# Altium PCB BBONE_TEMP.PcbDoc
Units mil, origin at the board's own origin, x right, y up, seen from the top; angles counter-clockwise.
Board outline 6000 x 4000 mil, 2 copper layers (Top Layer, Bottom Layer); 102 components, 645 nets, 842 pads, 89 vias.
Unrouted connection lines stored in the file: 281.
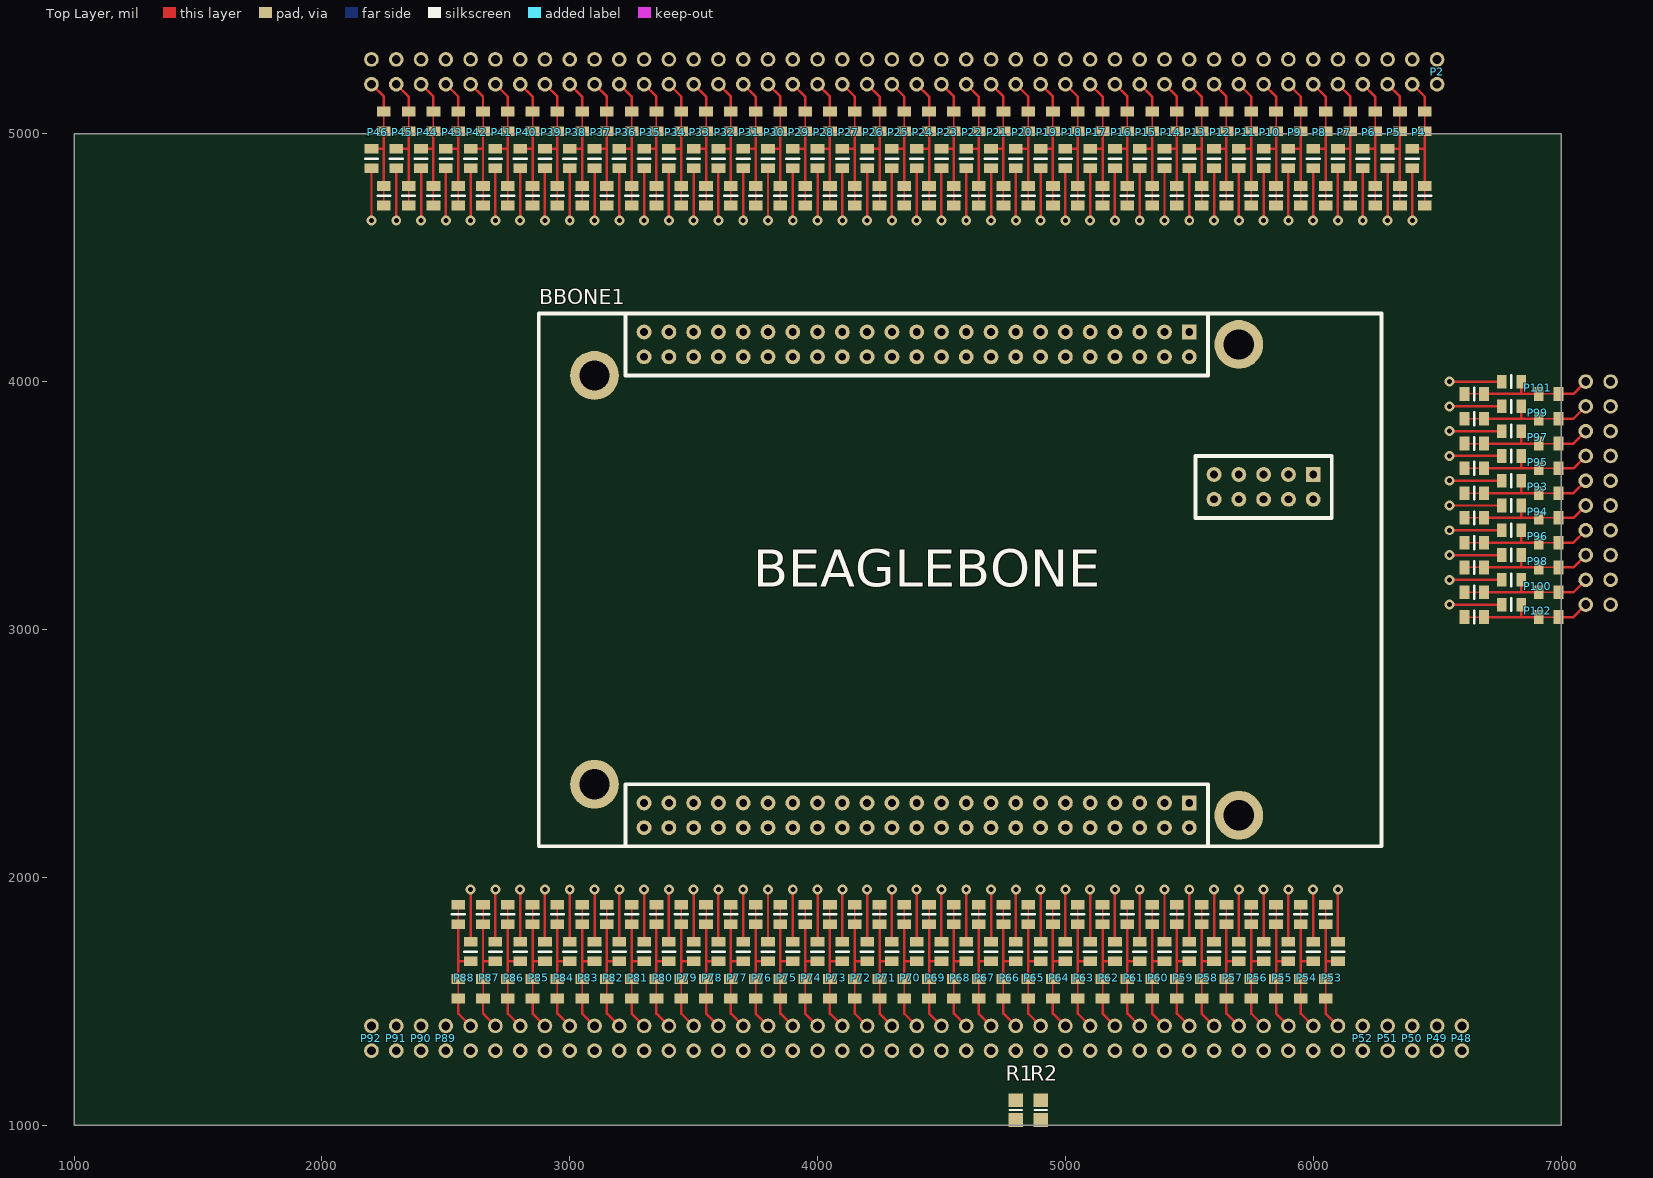
[diagram p0: Top Layer view]
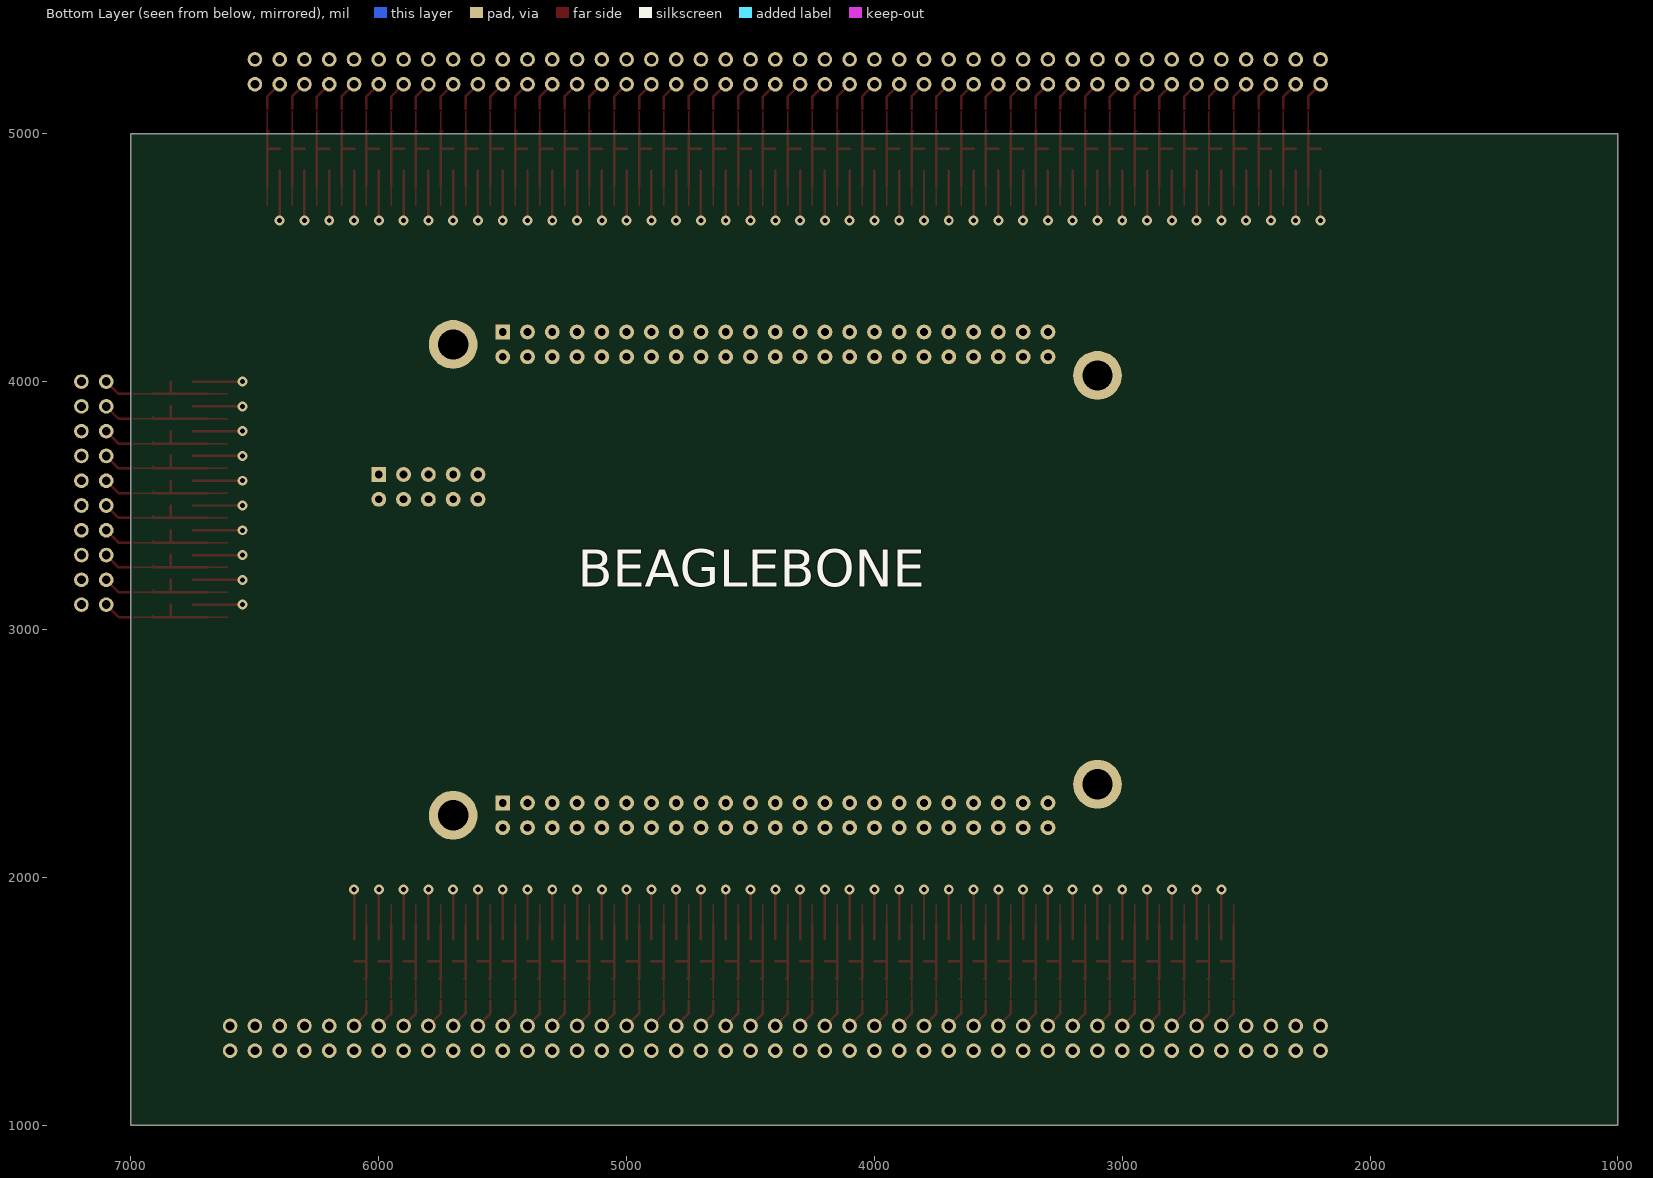
[diagram p1: Bottom Layer view, seen from below]

## Layer stack, top to bottom
Top Layer: signal copper 1.4
Dielectric: dielectric 12.6, FR-4, Dk 4.8
Bottom Layer: signal copper 1.4

## Board outline
1000,1000 7000,1000 7000,5000 1000,5000

## Design rules (kind name [scope] priority, off if disabled: settings)
Clearance [All] p1: gap=10
PolygonConnect [All] p1: connectstyle=Relief reliefconductorwidth=10 reliefentries=4 polygonreliefangle="90 Angle"
RoutingVias [All] p1: holewidth=28 width=50 viastyle="Through Hole" minholewidth=28 minwidth=50 maxholewidth=28 maxwidth=50
SilkscreenOverComponentPads [All] p1: minsilkscreentomaskgap=10
SolderMaskExpansion [All] p1: expansion=4
Width [All] p1: maxlimit=10 minlimit=10 preferedwidth=10
27 further rules are at their usual default settings.

## Components (designator, comment, footprint, x,y, rotation, side; value= is the part's Value field where it differs from the comment)
BBONE1 "Beagle_Bone" Beaglebone 2875,4275 r0 top
P2 "Jumper" Jumper 6500,5300 r270 top
P4 "Jumper_Filter" Jumper_filter 6400,5300 r270 top
P5 "Jumper_Filter" Jumper_filter 6300,5300 r270 top
P6 "Jumper_Filter" Jumper_filter 6200,5300 r270 top
P7 "Jumper_Filter" Jumper_filter 6100,5300 r270 top
P8 "Jumper_Filter" Jumper_filter 6000,5300 r270 top
P9 "Jumper_Filter" Jumper_filter 5900,5300 r270 top
P10 "Jumper_Filter" Jumper_filter 5800,5300 r270 top
P11 "Jumper_Filter" Jumper_filter 5700,5300 r270 top
P12 "Jumper_Filter" Jumper_filter 5600,5300 r270 top
P13 "Jumper_Filter" Jumper_filter 5500,5300 r270 top
P14 "Jumper_Filter" Jumper_filter 5400,5300 r270 top
P15 "Jumper_Filter" Jumper_filter 5300,5300 r270 top
P16 "Jumper_Filter" Jumper_filter 5200,5300 r270 top
P17 "Jumper_Filter" Jumper_filter 5100,5300 r270 top
P18 "Jumper_Filter" Jumper_filter 5000,5300 r270 top
P19 "Jumper_Filter" Jumper_filter 4900,5300 r270 top
P20 "Jumper_Filter" Jumper_filter 4800,5300 r270 top
P21 "Jumper_Filter" Jumper_filter 4700,5300 r270 top
P22 "Jumper_Filter" Jumper_filter 4600,5300 r270 top
P23 "Jumper_Filter" Jumper_filter 4500,5300 r270 top
P24 "Jumper_Filter" Jumper_filter 4400,5300 r270 top
P25 "Jumper_Filter" Jumper_filter 4300,5300 r270 top
P26 "Jumper_Filter" Jumper_filter 4200,5300 r270 top
P27 "Jumper_Filter" Jumper_filter 4100,5300 r270 top
P28 "Jumper_Filter" Jumper_filter 4000,5300 r270 top
P29 "Jumper_Filter" Jumper_filter 3900,5300 r270 top
P30 "Jumper_Filter" Jumper_filter 3800,5300 r270 top
P31 "Jumper_Filter" Jumper_filter 3700,5300 r270 top
P32 "Jumper_Filter" Jumper_filter 3600,5300 r270 top
P33 "Jumper_Filter" Jumper_filter 3500,5300 r270 top
P34 "Jumper_Filter" Jumper_filter 3400,5300 r270 top
P35 "Jumper_Filter" Jumper_filter 3300,5300 r270 top
P36 "Jumper_Filter" Jumper_filter 3200,5300 r270 top
P37 "Jumper_Filter" Jumper_filter 3100,5300 r270 top
P38 "Jumper_Filter" Jumper_filter 3000,5300 r270 top
P39 "Jumper_Filter" Jumper_filter 2900,5300 r270 top
P40 "Jumper_Filter" Jumper_filter 2800,5300 r270 top
P41 "Jumper_Filter" Jumper_filter 2700,5300 r270 top
P42 "Jumper_Filter" Jumper_filter 2600,5300 r270 top
P43 "Jumper_Filter" Jumper_filter 2500,5300 r270 top
P44 "Jumper_Filter" Jumper_filter 2400,5300 r270 top
P45 "Jumper_Filter" Jumper_filter 2300,5300 r270 top
P46 "Jumper_Filter" Jumper_filter 2200,5300 r270 top
P48 "Jumper" Jumper 6600,1300 r90 top
P49 "Jumper" Jumper 6500,1300 r90 top
P50 "Jumper" Jumper 6400,1300 r90 top
P51 "Jumper" Jumper 6300,1300 r90 top
P52 "Jumper" Jumper 6200,1300 r90 top
P53 "Jumper_Filter" Jumper_filter 6100,1300 r90 top
P54 "Jumper_Filter" Jumper_filter 6000,1300 r90 top
P55 "Jumper_Filter" Jumper_filter 5900,1300 r90 top
P56 "Jumper_Filter" Jumper_filter 5800,1300 r90 top
P57 "Jumper_Filter" Jumper_filter 5700,1300 r90 top
P58 "Jumper_Filter" Jumper_filter 5600,1300 r90 top
P59 "Jumper_Filter" Jumper_filter 5500,1300 r90 top
P60 "Jumper_Filter" Jumper_filter 5400,1300 r90 top
P61 "Jumper_Filter" Jumper_filter 5300,1300 r90 top
P62 "Jumper_Filter" Jumper_filter 5200,1300 r90 top
P63 "Jumper_Filter" Jumper_filter 5100,1300 r90 top
P64 "Jumper_Filter" Jumper_filter 5000,1300 r90 top
P65 "Jumper_Filter" Jumper_filter 4900,1300 r90 top
P66 "Jumper_Filter" Jumper_filter 4800,1300 r90 top
P67 "Jumper_Filter" Jumper_filter 4700,1300 r90 top
P68 "Jumper_Filter" Jumper_filter 4600,1300 r90 top
P69 "Jumper_Filter" Jumper_filter 4500,1300 r90 top
P70 "Jumper_Filter" Jumper_filter 4400,1300 r90 top
P71 "Jumper_Filter" Jumper_filter 4300,1300 r90 top
P72 "Jumper_Filter" Jumper_filter 4200,1300 r90 top
P73 "Jumper_Filter" Jumper_filter 4100,1300 r90 top
P74 "Jumper_Filter" Jumper_filter 4000,1300 r90 top
P75 "Jumper_Filter" Jumper_filter 3900,1300 r90 top
P76 "Jumper_Filter" Jumper_filter 3800,1300 r90 top
P77 "Jumper_Filter" Jumper_filter 3700,1300 r90 top
P78 "Jumper_Filter" Jumper_filter 3600,1300 r90 top
P79 "Jumper_Filter" Jumper_filter 3500,1300 r90 top
P80 "Jumper_Filter" Jumper_filter 3400,1300 r90 top
P81 "Jumper_Filter" Jumper_filter 3300,1300 r90 top
P82 "Jumper_Filter" Jumper_filter 3200,1300 r90 top
P83 "Jumper_Filter" Jumper_filter 3100,1300 r90 top
P84 "Jumper_Filter" Jumper_filter 3000,1300 r90 top
P85 "Jumper_Filter" Jumper_filter 2900,1300 r90 top
P86 "Jumper_Filter" Jumper_filter 2800,1300 r90 top
P87 "Jumper_Filter" Jumper_filter 2700,1300 r90 top
P88 "Jumper_Filter" Jumper_filter 2600,1300 r90 top
P89 "Jumper" Jumper 2500,1300 r90 top
P90 "Jumper" Jumper 2400,1300 r90 top
P91 "Jumper" Jumper 2300,1300 r90 top
P92 "Jumper" Jumper 2200,1300 r90 top
P93 "Jumper_Filter" Jumper_filter 7200,3600 r180 top
P94 "Jumper_Filter" Jumper_filter 7200,3500 r180 top
P95 "Jumper_Filter" Jumper_filter 7200,3700 r180 top
P96 "Jumper_Filter" Jumper_filter 7200,3400 r180 top
P97 "Jumper_Filter" Jumper_filter 7200,3800 r180 top
P98 "Jumper_Filter" Jumper_filter 7200,3300 r180 top
P99 "Jumper_Filter" Jumper_filter 7200,3900 r180 top
P100 "Jumper_Filter" Jumper_filter 7200,3200 r180 top
P101 "Jumper_Filter" Jumper_filter 7200,4000 r180 top
P102 "Jumper_Filter" Jumper_filter 7200,3100 r180 top
R1 "1206 Resistor" 6-0805_M 4800,1060 r90 top
R2 "1206 Resistor" 6-0805_M 4900,1060 r90 top

## Footprints (in the part's own frame and the unit in brackets; to place one, negate y for a bottom-side part, rotate by r counter-clockwise, add the part's x,y. Pads: shape width x height; smd on the part's side, far side on the other; paste and mask are expansions set on the pad)
6-0805_M [mm] "Chip Resistor, Body 2.0x1.2mm, IPC Low Density"
  rect 1.4x1.5 smd: 1(-1,0) 2(1,0)
  silkscreen extent 0,-0.65 0,0.65, body extent -1.07,-0.7 1.07,0.7, height 0.7
Beaglebone [mil]
  rect 60x60 hole 31.5 mask+2.76: A01(2625,-75) B01(2625,-1975) P01(3125,-650)
  round 60 hole 31.5 mask+2.76: A02(2625,-175) A03(2525,-75) A04(2525,-175) A05(2425,-75) A06(2425,-175) A07(2325,-75) A08(2325,-175) A09(2225,-75) A10(2225,-175) A11(2125,-75) A12(2125,-175) A13(2025,-75) A14(2025,-175) A15(1925,-75) A16(1925,-175) A17(1825,-75) A18(1825,-175) A19(1725,-75) A20(1725,-175) A21(1625,-75) A22(1625,-175) A23(1525,-75) A24(1525,-175) A25(1425,-75) A26(1425,-175) A27(1325,-75) A28(1325,-175) A29(1225,-75) A30(1225,-175) A31(1125,-75) A32(1125,-175) A33(1025,-75) A34(1025,-175) A35(925,-75) A36(925,-175) A37(825,-75) A38(825,-175) A39(725,-75) A40(725,-175) A41(625,-75) A42(625,-175) A43(525,-75) A44(525,-175) A45(425,-75) A46(425,-175) B02(2625,-2075) B03(2525,-1975) B04(2525,-2075) B05(2425,-1975) B06(2425,-2075) B07(2325,-1975) B08(2325,-2075) B09(2225,-1975) B10(2225,-2075) B11(2125,-1975) B12(2125,-2075) B13(2025,-1975) B14(2025,-2075) B15(1925,-1975) B16(1925,-2075) B17(1825,-1975) B18(1825,-2075) B19(1725,-1975) B20(1725,-2075) B21(1625,-1975) B22(1625,-2075) B23(1525,-1975) B24(1525,-2075) B25(1425,-1975) B26(1425,-2075) B27(1325,-1975) B28(1325,-2075) B29(1225,-1975) B30(1225,-2075) B31(1125,-1975) B32(1125,-2075) B33(1025,-1975) B34(1025,-2075) B35(925,-1975) B36(925,-2075) B37(825,-1975) B38(825,-2075) B39(725,-1975) B40(725,-2075) B41(625,-1975) B42(625,-2075) B43(525,-1975) B44(525,-2075) B45(425,-1975) B46(425,-2075) P02(3125,-750) P03(3025,-650) P04(3025,-750) P05(2925,-650) P06(2925,-750) P07(2825,-650) P08(2825,-750) P09(2725,-650) P10(2725,-750)
  round 196.85 hole 122.05 mask+2.76: M1(225,-250) M2(225,-1900) M3(2825,-125) M4(2825,-2025)
  silkscreen extent 0,-2150 3400,0
Jumper [mm] "Connector; Header; 2 Position"
  round 1.5 hole 0.9: 1(0,0) 2(2.54,0)
Jumper_filter [mm] "Connector; Header; 2 Position"
  round 1.5 hole 0.9: 1(0,0) 2(2.54,0)
  rect 1x1.4 smd: 2(5.35,1.27) 2(7.35,1.27) 2(9.16,0) 2(12.97,1.27) 2(14.97,1.27) 3(11.16,0)
  Top Layer lines w0.152: 7.366,1.016 7.366,1.27 ; 14.986,1.27 5.334,1.27
  Top Layer lines w0.254: 16.51,0 11.43,0 ; 9.144,0 9.144,1.27 ; 2.54,0 3.81,1.27 5.08,1.27 ; 12.954,1.27 7.366,1.27
  silkscreen extent 10.16,-0.65 13.97,1.92, body extent 5.25,-0.65 15.07,1.92, height 0.5

## Part data
R1 R2: library part "1206 Thick Film Resistor 1%", "1206 Thick Film Resistor 1%"

## Via types
v1: diameter 40, hole 20, Top Layer to Bottom Layer, 89 vias

## Nets (pads, with @x,y where several pads share a name; then routed paths per layer and width w, separated by ;. In a path a pad name is that pad's centre, name@x,y a point inside that pad or via, vN(x,y) a via of type N, cw(c..) or ccw(c..) an arc to the next point about the centre after c; other vN are vias at no path point)
3V3_AUX: 
3V3_AUX_E\N\: 
3V3_BBONE: P49.1 P50.1 R1.1 R2.1
3V3_COMMS: 
3V3_CSC: 
3V3_PWR: 
3V3_UNREG: 
5V0_AUX: 
5V0_AUX_E\N\: 
5V0_BBONE: P51.1 P52.1
5V0_BCR: 
5V0_TELEM: 
5V0_UNREG: 
8V0_RX1: 
8V0_RX2: 
AFSK1_DET: 
AFSK1_M0: 
AFSK1_M1: 
AFSK1_RX: 
AFSK1_RXD: 
AFSK1_TX: 
AFSK1_TXD: 
AFSK2_DET: 
AFSK2_M0: 
AFSK2_M1: 
AFSK2_RX: 
AFSK2_RXD: 
AFSK2_TX: 
AFSK2_TXD: 
BBONE_E\N\: 
BBONE_I2C2_SCL: P65.1 R2.2
BBONE_I2C2_SDA: P66.1 R1.2
BCR_E\N\: 
BCR_MISO: 
BCR_MOSI: 
BCR_R\S\T\: 
BCR_SCK: 
COMMS_E\N\: 
CSC_E\N\: 
CSC_ISP: 
CSC_RST: 
DTMF1Q1: 
DTMF1Q2: 
DTMF1Q3: 
DTMF1Q4: 
DTMF1ST: 
DTMF2Q1: 
DTMF2Q2: 
DTMF2Q3: 
DTMF2Q4: 
DTMF2ST: 
GND: P2.1 P4.3 P5.3 P6.3 P7.3 P8.3 P9.3 P10.3 P11.3 P12.3 P13.3 P14.3 P15.3 P16.3 P17.3 P18.3 P19.3 P20.3 P21.3 P22.3 P23.3 P24.3 P25.3 P26.3 P27.3 P28.3 P29.3 P30.3 P31.3 P32.3 P33.3 P34.3 P35.3 P36.3 P37.3 P38.3 P39.3 P40.3 P41.3 P42.3 P43.3 P44.3 P45.3 P46.3 P48.1 P53.3 P54.3 P55.3 P56.3 P57.3 P58.3 P59.3 P60.3 P61.3 P62.3 P63.3 P64.3 P65.3 P66.3 P67.3 P68.3 P69.3 P70.3 P71.3 P72.3 P73.3 P74.3 P75.3 P76.3 P77.3 P78.3 P79.3 P80.3 P81.3 P82.3 P83.3 P84.3 P85.3 P86.3 P87.3 P88.3 P89.1 P90.1 P91.1 P92.1 P93.3 P94.3 P95.3 P96.3 P97.3 P98.3 P99.3 P100.3 P101.3 P102.3
  other v1: 2600,1950 2700,1950 2800,1950 2900,1950 3000,1950 3100,1950 3200,1950 3300,1950 3400,1950 3500,1950 3600,1950 3700,1950 3800,1950 3900,1950 4000,1950 4100,1950 4200,1950 4300,1950 4400,1950 4500,1950 4600,1950 4700,1950 4800,1950 4900,1950 5000,1950 5100,1950 5200,1950 5300,1950 5400,1950 5500,1950 5600,1950 5700,1950 5800,1950 5900,1950 6000,1950 6100,1950 6550,3100 6550,3200 6550,3300 6550,3400 6550,3500 6550,3600 6550,3700 6550,3800 6550,3900 6550,4000 2200,4650 2300,4650 2400,4650 2500,4650 2600,4650 2700,4650 2800,4650 2900,4650 3000,4650 3100,4650 3200,4650 3300,4650 3400,4650 3500,4650 3600,4650 3700,4650 3800,4650 3900,4650 4000,4650 4100,4650 4200,4650 4300,4650 4400,4650 4500,4650 4600,4650 4700,4650 4800,4650 4900,4650 5000,4650 5100,4650 5200,4650 5300,4650 5400,4650 5500,4650 5600,4650 5700,4650 5800,4650 5900,4650 6000,4650 6100,4650 6200,4650 6300,4650 6400,4650
I2C0_SCL: 
I2C0_SDA: 
I2C1_SCL: P63.1
I2C1_SDA: P64.1
I2C2_SCL: 
I2C2_SCL_5V: 
I2C2_SDA: 
I2C2_SDA_5V: 
NetBBONE1_A01: BBONE1.A01
NetBBONE1_A02: BBONE1.A02 P2.2
NetBBONE1_A03: BBONE1.A03
NetBBONE1_A04: BBONE1.A04 P4.2
NetBBONE1_A05: BBONE1.A05 P5.2
NetBBONE1_A06: BBONE1.A06 P6.2
NetBBONE1_A07: BBONE1.A07 P7.2@6100,5200
NetBBONE1_A08: BBONE1.A08 P8.2@6000,5200
NetBBONE1_A09: BBONE1.A09 P9.2@5900,5200
NetBBONE1_A10: BBONE1.A10 P10.2@5800,5200
NetBBONE1_A11: BBONE1.A11 P11.2@5700,5200
NetBBONE1_A12: BBONE1.A12 P12.2@5600,5200
NetBBONE1_A13: BBONE1.A13 P13.2@5500,5200
NetBBONE1_A14: BBONE1.A14 P14.2@5400,5200
NetBBONE1_A15: BBONE1.A15 P15.2@5300,5200
NetBBONE1_A16: BBONE1.A16 P16.2@5200,5200
NetBBONE1_A17: BBONE1.A17 P17.2@5100,5200
NetBBONE1_A18: BBONE1.A18 P18.2@5000,5200
NetBBONE1_A19: BBONE1.A19 P19.2@4900,5200
NetBBONE1_A20: BBONE1.A20 P20.2
NetBBONE1_A21: BBONE1.A21 P21.2
NetBBONE1_A22: BBONE1.A22 P22.2@4600,5200
NetBBONE1_A23: BBONE1.A23 P23.2@4500,5200
NetBBONE1_A24: BBONE1.A24 P24.2@4400,5200
NetBBONE1_A25: BBONE1.A25 P25.2@4300,5200
NetBBONE1_A26: BBONE1.A26 P26.2@4200,5200
NetBBONE1_A27: BBONE1.A27 P27.2@4100,5200
NetBBONE1_A28: BBONE1.A28 P28.2@4000,5200
NetBBONE1_A29: BBONE1.A29 P29.2@3900,5200
NetBBONE1_A30: BBONE1.A30 P30.2@3800,5200
NetBBONE1_A31: BBONE1.A31 P31.2@3700,5200
NetBBONE1_A32: BBONE1.A32 P32.2@3600,5200
NetBBONE1_A33: BBONE1.A33 P33.2@3500,5200
NetBBONE1_A34: BBONE1.A34 P34.2@3400,5200
NetBBONE1_A35: BBONE1.A35 P35.2@3300,5200
NetBBONE1_A36: BBONE1.A36 P36.2@3200,5200
NetBBONE1_A37: BBONE1.A37 P37.2@3100,5200
NetBBONE1_A38: BBONE1.A38 P38.2
NetBBONE1_A39: BBONE1.A39 P39.2@2900,5200
NetBBONE1_A40: BBONE1.A40 P40.2@2800,5200
NetBBONE1_A41: BBONE1.A41 P41.2@2700,5200
NetBBONE1_A42: BBONE1.A42 P42.2@2600,5200
NetBBONE1_A43: BBONE1.A43 P43.2@2500,5200
NetBBONE1_A44: BBONE1.A44 P44.2@2400,5200
NetBBONE1_A45: BBONE1.A45 P45.2@2300,5200
NetBBONE1_A46: BBONE1.A46 P46.2@2200,5200
NetBBONE1_B01: BBONE1.B01
NetBBONE1_B02: BBONE1.B02 P48.2
NetBBONE1_B03: BBONE1.B03 P49.2
NetBBONE1_B04: BBONE1.B04 P50.2
NetBBONE1_B05: BBONE1.B05 P51.2
NetBBONE1_B06: BBONE1.B06 P52.2
NetBBONE1_B07: BBONE1.B07 P53.2@6100,1400
NetBBONE1_B08: BBONE1.B08 P54.2@6000,1400
NetBBONE1_B09: BBONE1.B09 P55.2@5900,1400
NetBBONE1_B10: BBONE1.B10 P56.2@5800,1400
NetBBONE1_B11: BBONE1.B11 P57.2
NetBBONE1_B12: BBONE1.B12 P58.2@5600,1400
NetBBONE1_B13: BBONE1.B13 P59.2@5500,1400
NetBBONE1_B14: BBONE1.B14 P60.2@5400,1400
NetBBONE1_B15: BBONE1.B15 P61.2@5300,1400
NetBBONE1_B16: BBONE1.B16 P62.2@5200,1400
NetBBONE1_B17: BBONE1.B17 P63.2@5100,1400
NetBBONE1_B18: BBONE1.B18 P64.2@5000,1400
NetBBONE1_B19: BBONE1.B19 P65.2@4900,1400
NetBBONE1_B20: BBONE1.B20 P66.2@4800,1400
NetBBONE1_B21: BBONE1.B21 P67.2@4700,1400
NetBBONE1_B22: BBONE1.B22 P68.2@4600,1400
NetBBONE1_B23: BBONE1.B23 P69.2@4500,1400
NetBBONE1_B24: BBONE1.B24 P70.2@4400,1400
NetBBONE1_B25: BBONE1.B25 P71.2@4300,1400
NetBBONE1_B26: BBONE1.B26 P72.2@4200,1400
NetBBONE1_B27: BBONE1.B27 P73.2@4100,1400
NetBBONE1_B28: BBONE1.B28 P74.2@4000,1400
NetBBONE1_B29: BBONE1.B29 P75.2@3900,1400
NetBBONE1_B30: BBONE1.B30 P76.2@3800,1400
NetBBONE1_B31: BBONE1.B31 P77.2@3700,1400
NetBBONE1_B32: BBONE1.B32 P78.2@3600,1400
NetBBONE1_B33: BBONE1.B33 P79.2@3500,1400
NetBBONE1_B34: BBONE1.B34 P80.2@3400,1400
NetBBONE1_B35: BBONE1.B35 P81.2@3300,1400
NetBBONE1_B36: BBONE1.B36 P82.2@3200,1400
NetBBONE1_B37: BBONE1.B37 P83.2@3100,1400
NetBBONE1_B38: BBONE1.B38 P84.2@3000,1400
NetBBONE1_B39: BBONE1.B39 P85.2@2900,1400
NetBBONE1_B40: BBONE1.B40 P86.2@2800,1400
NetBBONE1_B41: BBONE1.B41 P87.2@2700,1400
NetBBONE1_B42: BBONE1.B42 P88.2@2600,1400
NetBBONE1_B43: BBONE1.B43 P89.2
NetBBONE1_B44: BBONE1.B44 P90.2
NetBBONE1_B45: BBONE1.B45 P91.2
NetBBONE1_B46: BBONE1.B46 P92.2
NetBBONE1_P01: BBONE1.P01 P93.2@7100,3600
NetBBONE1_P02: BBONE1.P02 P94.2@7100,3500
NetBBONE1_P03: BBONE1.P03 P95.2@7100,3700
NetBBONE1_P04: BBONE1.P04 P96.2@7100,3400
NetBBONE1_P05: BBONE1.P05 P97.2@7100,3800
NetBBONE1_P06: BBONE1.P06 P98.2@7100,3300
NetBBONE1_P07: BBONE1.P07 P99.2@7100,3900
NetBBONE1_P08: BBONE1.P08 P100.2@7100,3200
NetBBONE1_P09: BBONE1.P09 P101.2@7100,4000
NetBBONE1_P10: BBONE1.P10 P102.2@7100,3100
NetBCR1_1: 
NetBCR1_2: 
NetBCR1_3: 
NetBCR1_4: 
NetBCR1_5: 
NetBCR1_6: 
NetBCR1_7: 
NetBCR1_8: 
NetBCR1_9: 
NetBCR1_10: 
NetBCR1_11: 
NetBCR1_12: 
NetBCR1_13: 
NetBCR1_14: 
NetBCR1_15: 
NetBCR1_16: 
NetBCR1_17: 
NetBCR1_18: 
NetBCR1_19: 
NetBCR1_20: 
NetBCR1_21: 
NetBCR1_22: 
NetBCR1_23: 
NetBCR1_24: 
NetBCR1_25: 
NetBCR1_26: 
NetBCR1_27: 
NetBCR1_28: 
NetBCR1_29: 
NetBCR1_30: 
NetBCR1_31: 
NetBCR1_32: 
NetBCR1_33: 
NetBCR1_34: 
NetBCR1_35: 
NetC1_2: 
NetCOMMS_AFSK1_M0: 
NetCOMMS_AFSK1_M1: 
NetCOMMS_AFSK1_RXD: 
NetCOMMS_AFSK1_TXD: 
NetCOMMS_AFSK2_M0: 
NetCOMMS_AFSK2_M1: 
NetCOMMS_AFSK2_RXD: 
NetCOMMS_AFSK2_TXD: 
NetCOMMS_DTMF1_ES: 
NetCOMMS_DTMF1_Q1: 
NetCOMMS_DTMF1_Q2: 
NetCOMMS_DTMF1_Q3: 
NetCOMMS_DTMF1_Q4: 
NetCOMMS_DTMF1_ST: 
NetCOMMS_DTMF2_ES: 
NetCOMMS_DTMF2_Q1: 
NetCOMMS_DTMF2_Q2: 
NetCOMMS_DTMF2_Q3: 
NetCOMMS_DTMF2_Q4: 
NetCOMMS_DTMF2_ST: 
NetCOMMS_GMSK_RX1: 
NetCOMMS_GMSK_RX2: 
NetCOMMS_GMSK_TX1: 
NetCOMMS_GMSK_TX2: 
NetCOMMS_GND: 
NetCOMMS_RX1: 
NetCOMMS_RX2: 
NetCOMMS_S0: 
NetCOMMS_S1: 
NetCOMMS_S2: 
NetCOMMS_S3: 
NetCOMMS_S4: 
NetCOMMS_S5: 
NetCOMMS_S6: 
NetCOMMS_S7: 
NetCOMMS_TX1: 
NetCOMMS_TX2: 
NetCOMMS_VCC: 
NetCSC1_C1_1: 
NetCSC1_C1_2: 
NetCSC1_C1_3: 
NetCSC1_C1_4: 
NetCSC1_C1_5: 
NetCSC1_C1_6: 
NetCSC1_C1_7: 
NetCSC1_C1_8: 
NetCSC1_C1_9: 
NetCSC1_C1_10: 
NetCSC1_C1_11: 
NetCSC1_C1_12: 
NetCSC1_C1_13: 
NetCSC1_C1_14: 
NetCSC1_C1_15: 
NetCSC1_C1_16: 
NetCSC1_C1_17: 
NetCSC1_C1_18: 
NetCSC1_C1_19: 
NetCSC1_C1_20: 
NetCSC1_C1_21: 
NetCSC1_C1_22: 
NetCSC1_C1_23: 
NetCSC1_C1_24: 
NetCSC1_C1_25: 
NetCSC1_C1_26: 
NetCSC1_C1_27: 
NetCSC1_C1_28: 
NetCSC1_C1_29: 
NetCSC1_C1_30: 
NetCSC1_C1_31: 
NetCSC1_C1_32: 
NetCSC1_C1_33: 
NetCSC1_C1_34: 
NetCSC1_C1_35: 
NetCSC1_C1_36: 
NetCSC1_C1_37: 
NetCSC1_C1_38: 
NetCSC1_C1_39: 
NetCSC1_C1_40: 
NetCSC1_C2_1: 
NetCSC1_C2_2: 
NetCSC1_C2_3: 
NetCSC1_C2_4: 
NetCSC1_C2_5: 
NetCSC1_C2_6: 
NetCSC1_C2_7: 
NetCSC1_C2_8: 
NetCSC1_C2_9: 
NetCSC1_C2_10: 
NetCSC1_C2_11: 
NetCSC1_C2_12: 
NetCSC1_C2_13: 
NetCSC1_C2_14: 
NetCSC1_C2_15: 
NetCSC1_C2_16: 
NetCSC1_C2_17: 
NetCSC1_C2_18: 
NetCSC1_C2_19: 
NetCSC1_C2_20: 
NetCSC1_C2_21: 
NetCSC1_C2_22: 
NetCSC1_C2_23: 
NetCSC1_C2_24: 
NetCSC1_C2_25: 
NetCSC1_C2_26: 
NetCSC1_C2_27: 
NetCSC1_C2_28: 
NetCSC1_C2_29: 
NetCSC1_C2_30: 
NetCSC1_C2_31: 
NetCSC1_C2_32: 
NetCSC1_C2_33: 
NetCSC1_C2_34: 
NetCSC1_C2_35: 
NetCSC1_C2_36: 
NetCSC1_C2_37: 
NetCSC1_C2_38: 
NetCSC1_C2_39: 
NetCSC1_C2_40: 
NetCSC1_C3_1: 
NetCSC1_C3_2: 
NetCSC1_C3_3: 
NetCSC1_C3_4: 
NetCSC1_C3_5: 
NetCSC1_C3_6: 
NetCSC1_C3_7: 
NetCSC1_C3_8: 
NetCSC1_C3_9: 
NetCSC1_C3_10: 
NetCSC1_C3_11: 
NetCSC1_C3_12: 
NetCSC1_C3_13: 
NetCSC1_C3_14: 
NetCSC1_C3_15: 
NetCSC1_C3_16: 
NetCSC1_C3_17: 
NetCSC1_C3_18: 
NetCSC1_C3_19: 
NetCSC1_C3_20: 
NetCSC1_C3_21: 
NetCSC1_C3_22: 
NetCSC1_C3_23: 
NetCSC1_C3_24: 
NetCSC1_C3_25: 
NetCSC1_C3_26: 
NetCSC1_C3_27: 
NetCSC1_C3_28: 
NetCSC1_C3_29: 
NetCSC1_C3_30: 
NetCSC1_C3_31: 
NetCSC1_C3_32: 
NetCSC1_C3_33: 
NetCSC1_C3_34: 
NetCSC1_C3_35: 
NetCSC1_C3_36: 
NetCSC1_C3_37: 
NetCSC1_C3_38: 
NetCSC1_C3_39: 
NetCSC1_C3_40: 
NetCSC1_GND: 
NetCSC1_ISP1: 
NetCSC1_ISP2: 
NetCSC1_ISP3: 
NetCSC1_ISP4: 
NetCSC1_ISP5: 
NetCSC1_ISP6: 
NetD1_1: 
NetF13_1: 
NetF14_1: 
NetF15_1: 
NetF16_1: 
NetF17_1: 
NetF18_1: 
NetF19_1: 
NetF20_1: 
NetF21_1: 
NetF22_1: 
NetF23_1: 
NetF24_1: 
NetF25_1: 
NetF26_1: 
NetF27_1: 
NetF28_1: 
NetF29_1: 
NetF30_1: 
NetF31_1: 
NetF32_1: 
NetF32_2: 
NetF33_1: 
NetF33_2: 
NetF34_1: 
NetF34_2: 
NetF35_1: 
NetF35_2: 
NetF36_1: 
NetF36_2: 
NetF37_1: 
NetF37_2: 
NetF38_1: 
NetF38_2: 
NetF39_1: 
NetF39_2: 
NetF40_1: 
NetF40_2: 
NetF41_1: 
NetF41_2: 
NetF42_1: 
NetF42_2: 
NetF43_1: 
NetF43_2: 
NetF44_1: 
NetF44_2: 
NetF45_1: 
NetF45_2: 
NetF46_1: 
NetF46_2: 
NetF47_1: 
NetF47_2: 
NetF48_1: 
NetF48_2: 
NetF50_2: 
NetF51_2: 
NetF52_2: 
NetF53_2: 
NetF54_2: 
NetF55_2: 
NetF56_2: 
NetF57_2: 
NetF58_2: 
NetF59_1: 
NetF60_1: 
NetF61_2: 
NetF62_2: 
NetF63_1: 
NetF64_1: 
NetF65_1: 
NetF66_1: 
NetF67_1: 
NetF68_1: 
NetF69_1: 
NetF70_1: 
NetF71_1: 
NetF72_1: 
NetF73_1: 
NetF74_1: 
NetF75_1: 
NetF76_1: 
NetF77_1: 
NetF78_1: 
NetF79_1: 
NetF80_1: 
NetF81_1: 
NetF82_1: 
NetF83_1: 
NetF84_1: 
NetF84_2: 
NetF85_1: 
NetF86_1: 
NetF87_1: 
NetF88_1: 
NetF89_1: 
NetF91_1: 
NetF92_1: 
NetF93_1: 
NetF94_1: 
NetF95_1: 
NetF96_1: 
NetF97_1: 
NetF98_1: 
NetF99_2: 
NetF100_1: 
NetF101_1: 
NetF102_1: 
NetF103_1: 
NetF104_1: 
NetF105_1: 
NetF106_1: 
NetF106_2: 
NetF107_1: 
NetF107_2: 
NetF108_1: 
NetF108_2: 
NetF109_1: 
NetF109_2: 
NetF110_1: 
NetF110_2: 
NetF111_1: 
NetF111_2: 
NetF112_1: 
NetF112_2: 
NetF113_1: 
NetF113_2: 
NetF114_1: 
NetF114_2: 
NetF115_1: 
NetF115_2: 
NetF116_1: 
NetF116_2: 
NetF117_1: 
NetF117_2: 
NetF118_1: 
NetF118_2: 
NetF119_1: 
NetF119_2: 
NetF120_1: 
NetF120_2: 
NetF121_1: 
NetF121_2: 
NetF122_1: 
NetF122_2: 
NetF123_1: 
NetF123_2: 
NetF124_1: 
NetF124_2: 
NetF125_1: 
NetF125_2: 
NetF126_1: 
NetF126_2: 
NetF127_1: 
NetF127_2: 
NetGMSK1_1C: 
NetGMSK1_2A: 
NetGMSK1_2B: 
NetGMSK1_3A: 
NetGMSK1_3B: 
NetGMSK1_4A: 
NetGMSK1_4B: 
NetGMSK1_5C: 
NetGMSK1_6A: 
NetGMSK1_6B: 
NetGMSK1_8C: 
NetJ15_1: 
NetJ15_2: 
NetJ15_3: 
NetJ15_4: 
NetJ15_5: 
NetJ15_6: 
NetJ15_7: 
NetJ15_8: 
NetJ15_9: 
NetJ16_1: 
NetJ16_2: 
NetJ16_3: 
NetJ16_4: 
NetJ16_5: 
NetJ16_6: 
NetJ16_7: 
NetJ16_8: 
NetJ16_9: 
NetJ25_2: 
NetJ26_2: 
NetLDO1_EN1: 
NetLDO1_EN2: 
NetLDO1_EN3: 
NetLDO1_EN4: 
NetLDO1_GND: 
NetLDO1_RST1: 
NetLDO1_RST2: 
NetLDO1_RST3: 
NetLDO1_RST4: 
NetLDO2_EN1: 
NetLDO2_EN2: 
NetLDO2_EN3: 
NetLDO2_EN4: 
NetLDO2_GND: 
NetLDO2_RST1: 
NetLDO2_RST2: 
NetLDO2_RST3: 
NetLDO2_RST4: 
NetP275_2: 
NetP276_2: 
NetP297_1: 
NetP298_1: 
NetP299_1: 
NetP300_1: 
NetP358_2: 
NetP359_2: 
NetP362_2: 
NetP363_2: 
NetP365_2: 
NetP366_2: 
NetP368_2: 
NetP369_2: 
NetP372_1: 
NetP375_1: 
NetP377_1: 
NetP378_1: 
NetP380_1: 
NetP381_1: 
PLLACQ1: P24.1
PLLACQ2: P25.1
PWR_E\N\: 
RX1_AF: 
RX1_GMSK: 
RX2_AF: 
RX2_GMSK: 
RX_PSAVE1: P15.1
RX_PSAVE2: P16.1
RX_S/N1: P20.1
RX_S/N2: P21.1
RXACQ1: P17.1
RXACQ2: P18.1
RXCLK1: P5.1
RXCLK2: P6.1
RXDATA1: P57.1
RXDATA2: P38.1
RXHOLD1: P11.1
RXHOLD2: P12.1
S0: 
S1: 
S2: 
S3: 
S4: 
S5: 
S6: 
S7: 
SOLA_X+_T: 
SOLA_X+_V: 
SOLA_X-_T: 
SOLA_X-_V: 
SOLA_Y+_T: 
SOLA_Y+_V: 
SOLA_Y-_T: 
SOLA_Y-_V: 
SOLA_Z+_T: 
SOLA_Z+_V: 
SOLA_Z-_T: 
SOLA_Z-_V: 
TBATT: 
TELEM_E\N\: 
TX1_AF: 
TX1_GMSK: 
TX2_AF: 
TX2_GMSK: 
TX_PSAVE1: P22.1
TX_PSAVE2: P23.1
TXCLK1: 
TXCLK2: P4.1
TXDATA1: P59.1
TXDATA2: P37.1
TXEN1: P26.1
TXEN2: P27.1
UART0_RX: 
UART0_TX: 
V_BATT: 
V_LOAD: 
VVAR_TX1: 
VVAR_TX2: 
pads on no net: BBONE1.M1 BBONE1.M2 BBONE1.M3 BBONE1.M4 P7.1 P7.2@6100,4939.37 P7.2@6150,4710.63 P7.2@6150,4789.37 P7.2@6150,5010.63 P7.2@6150,5089.37 P8.1 P8.2@6000,4939.37 P8.2@6050,4710.63 P8.2@6050,4789.37 P8.2@6050,5010.63 P8.2@6050,5089.37 P9.1 P9.2@5900,4939.37 P9.2@5950,4710.63 P9.2@5950,4789.37 P9.2@5950,5010.63 P9.2@5950,5089.37 P10.1 P10.2@5800,4939.37 P10.2@5850,4710.63 P10.2@5850,4789.37 P10.2@5850,5010.63 P10.2@5850,5089.37 P11.2@5700,4939.37 P11.2@5750,4710.63 P11.2@5750,4789.37 P11.2@5750,5010.63 P11.2@5750,5089.37 P12.2@5600,4939.37 P12.2@5650,4710.63 P12.2@5650,4789.37 P12.2@5650,5010.63 P12.2@5650,5089.37 P13.1 P13.2@5500,4939.37 P13.2@5550,4710.63 P13.2@5550,4789.37 P13.2@5550,5010.63 P13.2@5550,5089.37 P14.1 P14.2@5400,4939.37 P14.2@5450,4710.63 P14.2@5450,4789.37 P14.2@5450,5010.63 P14.2@5450,5089.37 P15.2@5300,4939.37 P15.2@5350,4710.63 P15.2@5350,4789.37 P15.2@5350,5010.63 P15.2@5350,5089.37 P16.2@5200,4939.37 P16.2@5250,4710.63 P16.2@5250,4789.37 P16.2@5250,5010.63 P16.2@5250,5089.37 P17.2@5100,4939.37 P17.2@5150,4710.63 P17.2@5150,4789.37 P17.2@5150,5010.63 P17.2@5150,5089.37 P18.2@5000,4939.37 P18.2@5050,4710.63 P18.2@5050,4789.37 P18.2@5050,5010.63 P18.2@5050,5089.37 P19.1 P19.2@4900,4939.37 P19.2@4950,4710.63 P19.2@4950,4789.37 P19.2@4950,5010.63 P19.2@4950,5089.37 P22.2@4600,4939.37 P22.2@4650,4710.63 P22.2@4650,4789.37 P22.2@4650,5010.63 P22.2@4650,5089.37 P23.2@4500,4939.37 P23.2@4550,4710.63 P23.2@4550,4789.37 P23.2@4550,5010.63 P23.2@4550,5089.37 P24.2@4400,4939.37 P24.2@4450,4710.63 P24.2@4450,4789.37 P24.2@4450,5010.63 P24.2@4450,5089.37 P25.2@4300,4939.37 P25.2@4350,4710.63 P25.2@4350,4789.37 P25.2@4350,5010.63 P25.2@4350,5089.37 P26.2@4200,4939.37 P26.2@4250,4710.63 P26.2@4250,4789.37 P26.2@4250,5010.63 P26.2@4250,5089.37 P27.2@4100,4939.37 P27.2@4150,4710.63 P27.2@4150,4789.37 P27.2@4150,5010.63 P27.2@4150,5089.37 P28.1 P28.2@4000,4939.37 P28.2@4050,4710.63 P28.2@4050,4789.37 P28.2@4050,5010.63 P28.2@4050,5089.37 P29.1 P29.2@3900,4939.37 P29.2@3950,4710.63 P29.2@3950,4789.37 P29.2@3950,5010.63 P29.2@3950,5089.37 P30.1 P30.2@3800,4939.37 P30.2@3850,4710.63 P30.2@3850,4789.37 P30.2@3850,5010.63 P30.2@3850,5089.37 P31.1 P31.2@3700,4939.37 P31.2@3750,4710.63 P31.2@3750,4789.37 P31.2@3750,5010.63 P31.2@3750,5089.37 P32.1 P32.2@3600,4939.37 P32.2@3650,4710.63 P32.2@3650,4789.37 P32.2@3650,5010.63 P32.2@3650,5089.37 P33.1 P33.2@3500,4939.37 P33.2@3550,4710.63 P33.2@3550,4789.37 P33.2@3550,5010.63 P33.2@3550,5089.37 P34.1 P34.2@3400,4939.37 P34.2@3450,4710.63 P34.2@3450,4789.37 P34.2@3450,5010.63 P34.2@3450,5089.37 P35.1 P35.2@3300,4939.37 P35.2@3350,4710.63 P35.2@3350,4789.37 P35.2@3350,5010.63 P35.2@3350,5089.37 P36.1 P36.2@3200,4939.37 P36.2@3250,4710.63 P36.2@3250,4789.37 P36.2@3250,5010.63 P36.2@3250,5089.37 P37.2@3100,4939.37 P37.2@3150,4710.63 P37.2@3150,4789.37 P37.2@3150,5010.63 P37.2@3150,5089.37 P39.1 P39.2@2900,4939.37 P39.2@2950,4710.63 P39.2@2950,4789.37 P39.2@2950,5010.63 P39.2@2950,5089.37 P40.1 P40.2@2800,4939.37 P40.2@2850,4710.63 P40.2@2850,4789.37 P40.2@2850,5010.63 P40.2@2850,5089.37 P41.1 P41.2@2700,4939.37 P41.2@2750,4710.63 P41.2@2750,4789.37 P41.2@2750,5010.63 P41.2@2750,5089.37 P42.1 P42.2@2600,4939.37 P42.2@2650,4710.63 P42.2@2650,4789.37 P42.2@2650,5010.63 P42.2@2650,5089.37 P43.1 P43.2@2500,4939.37 P43.2@2550,4710.63 P43.2@2550,4789.37 P43.2@2550,5010.63 P43.2@2550,5089.37 P44.1 P44.2@2400,4939.37 P44.2@2450,4710.63 P44.2@2450,4789.37 P44.2@2450,5010.63 P44.2@2450,5089.37 P45.1 P45.2@2300,4939.37 P45.2@2350,4710.63 P45.2@2350,4789.37 P45.2@2350,5010.63 P45.2@2350,5089.37 P46.1 P46.2@2200,4939.37 P46.2@2250,4710.63 P46.2@2250,4789.37 P46.2@2250,5010.63 P46.2@2250,5089.37 P53.1 P53.2@6050,1510.63 P53.2@6050,1589.37 P53.2@6050,1810.63 P53.2@6050,1889.37 P53.2@6100,1660.63 P54.1 P54.2@5950,1510.63 P54.2@5950,1589.37 P54.2@5950,1810.63 P54.2@5950,1889.37 P54.2@6000,1660.63 P55.1 P55.2@5850,1510.63 P55.2@5850,1589.37 P55.2@5850,1810.63 P55.2@5850,1889.37 P55.2@5900,1660.63 P56.1 P56.2@5750,1510.63 P56.2@5750,1589.37 P56.2@5750,1810.63 P56.2@5750,1889.37 P56.2@5800,1660.63 P58.1 P58.2@5550,1510.63 P58.2@5550,1589.37 P58.2@5550,1810.63 P58.2@5550,1889.37 P58.2@5600,1660.63 P59.2@5450,1510.63 P59.2@5450,1589.37 P59.2@5450,1810.63 P59.2@5450,1889.37 P59.2@5500,1660.63 P60.1 P60.2@5350,1510.63 P60.2@5350,1589.37 P60.2@5350,1810.63 P60.2@5350,1889.37 P60.2@5400,1660.63 P61.1 P61.2@5250,1510.63 P61.2@5250,1589.37 P61.2@5250,1810.63 P61.2@5250,1889.37 P61.2@5300,1660.63 P62.1 P62.2@5150,1510.63 P62.2@5150,1589.37 P62.2@5150,1810.63 P62.2@5150,1889.37 P62.2@5200,1660.63 P63.2@5050,1510.63 P63.2@5050,1589.37 P63.2@5050,1810.63 P63.2@5050,1889.37 P63.2@5100,1660.63 P64.2@4950,1510.63 P64.2@4950,1589.37 P64.2@4950,1810.63 P64.2@4950,1889.37 P64.2@5000,1660.63 P65.2@4850,1510.63 P65.2@4850,1589.37 P65.2@4850,1810.63 P65.2@4850,1889.37 P65.2@4900,1660.63 P66.2@4750,1510.63 P66.2@4750,1589.37 P66.2@4750,1810.63 P66.2@4750,1889.37 P66.2@4800,1660.63 P67.1 P67.2@4650,1510.63 P67.2@4650,1589.37 P67.2@4650,1810.63 P67.2@4650,1889.37 P67.2@4700,1660.63 P68.1 P68.2@4550,1510.63 P68.2@4550,1589.37 P68.2@4550,1810.63 P68.2@4550,1889.37 P68.2@4600,1660.63 P69.1 P69.2@4450,1510.63 P69.2@4450,1589.37 P69.2@4450,1810.63 P69.2@4450,1889.37 P69.2@4500,1660.63 P70.1 P70.2@4350,1510.63 P70.2@4350,1589.37 P70.2@4350,1810.63 P70.2@4350,1889.37 P70.2@4400,1660.63 P71.1 P71.2@4250,1510.63 P71.2@4250,1589.37 P71.2@4250,1810.63 P71.2@4250,1889.37 P71.2@4300,1660.63 P72.1 P72.2@4150,1510.63 P72.2@4150,1589.37 P72.2@4150,1810.63 P72.2@4150,1889.37 P72.2@4200,1660.63 P73.1 P73.2@4050,1510.63 P73.2@4050,1589.37 P73.2@4050,1810.63 P73.2@4050,1889.37 P73.2@4100,1660.63 P74.1 P74.2@3950,1510.63 P74.2@3950,1589.37 P74.2@3950,1810.63 P74.2@3950,1889.37 P74.2@4000,1660.63 P75.1 P75.2@3850,1510.63 P75.2@3850,1589.37 P75.2@3850,1810.63 P75.2@3850,1889.37 P75.2@3900,1660.63 P76.1 P76.2@3750,1510.63 P76.2@3750,1589.37 P76.2@3750,1810.63 P76.2@3750,1889.37 P76.2@3800,1660.63 P77.1 P77.2@3650,1510.63 P77.2@3650,1589.37 P77.2@3650,1810.63 P77.2@3650,1889.37 P77.2@3700,1660.63 P78.1 P78.2@3550,1510.63 P78.2@3550,1589.37 P78.2@3550,1810.63 P78.2@3550,1889.37 P78.2@3600,1660.63 P79.1 P79.2@3450,1510.63 P79.2@3450,1589.37 P79.2@3450,1810.63 P79.2@3450,1889.37 P79.2@3500,1660.63 P80.1 P80.2@3350,1510.63 P80.2@3350,1589.37 P80.2@3350,1810.63 P80.2@3350,1889.37 P80.2@3400,1660.63 P81.1 P81.2@3250,1510.63 P81.2@3250,1589.37 P81.2@3250,1810.63 P81.2@3250,1889.37 P81.2@3300,1660.63 P82.1 P82.2@3150,1510.63 P82.2@3150,1589.37 P82.2@3150,1810.63 P82.2@3150,1889.37 P82.2@3200,1660.63 P83.1 P83.2@3050,1510.63 P83.2@3050,1589.37 P83.2@3050,1810.63 P83.2@3050,1889.37 P83.2@3100,1660.63 P84.1 P84.2@2950,1510.63 P84.2@2950,1589.37 P84.2@2950,1810.63 P84.2@2950,1889.37 P84.2@3000,1660.63 P85.1 P85.2@2850,1510.63 P85.2@2850,1589.37 P85.2@2850,1810.63 P85.2@2850,1889.37 P85.2@2900,1660.63 P86.1 P86.2@2750,1510.63 P86.2@2750,1589.37 P86.2@2750,1810.63 P86.2@2750,1889.37 P86.2@2800,1660.63 P87.1 P87.2@2650,1510.63 P87.2@2650,1589.37 P87.2@2650,1810.63 P87.2@2650,1889.37 P87.2@2700,1660.63 P88.1 P88.2@2550,1510.63 P88.2@2550,1589.37 P88.2@2550,1810.63 P88.2@2550,1889.37 P88.2@2600,1660.63 P93.1 P93.2@6610.63,3550 P93.2@6689.37,3550 P93.2@6839.37,3600 P93.2@6910.63,3550 P93.2@6989.37,3550 P94.1 P94.2@6610.63,3450 P94.2@6689.37,3450 P94.2@6839.37,3500 P94.2@6910.63,3450 P94.2@6989.37,3450 P95.1 P95.2@6610.63,3650 P95.2@6689.37,3650 P95.2@6839.37,3700 P95.2@6910.63,3650 P95.2@6989.37,3650 P96.1 P96.2@6610.63,3350 P96.2@6689.37,3350 P96.2@6839.37,3400 P96.2@6910.63,3350 P96.2@6989.37,3350 P97.1 P97.2@6610.63,3750 P97.2@6689.37,3750 P97.2@6839.37,3800 P97.2@6910.63,3750 P97.2@6989.37,3750 P98.1 P98.2@6610.63,3250 P98.2@6689.37,3250 P98.2@6839.37,3300 P98.2@6910.63,3250 P98.2@6989.37,3250 P99.1 P99.2@6610.63,3850 P99.2@6689.37,3850 P99.2@6839.37,3900 P99.2@6910.63,3850 P99.2@6989.37,3850 P100.1 P100.2@6610.63,3150 P100.2@6689.37,3150 P100.2@6839.37,3200 P100.2@6910.63,3150 P100.2@6989.37,3150 P101.1 P101.2@6610.63,3950 P101.2@6689.37,3950 P101.2@6839.37,4000 P101.2@6910.63,3950 P101.2@6989.37,3950 P102.1 P102.2@6610.63,3050 P102.2@6689.37,3050 P102.2@6839.37,3100 P102.2@6910.63,3050 P102.2@6989.37,3050

## Text inside footprints (layer, text, board x,y; h text height)
BBONE1: Top Overlay "BEAGLEBONE" at 3741.14,3172.64 h150; Bottom Overlay "BEAGLEBONE" at 5197.83,3172.64 h150